# EAGLE board scheme (EAGLE 9.7.0)

Size 319.52 x 152.4 mm. Coordinates in mm from the lower left corner, seen from the top.
Outline: 0,0 319.52,0 319.52,152.4 0,152.4 0,0
Copper layers (1*16): Top 0.035mm / dielectric 1.5mm / Bottom 0.035mm
Design rules "default": minimum track width 6mil, minimum drill 0.35mm, track to track 6mil, track to pad 6mil, pad to pad 6mil, via to via 6mil, smd to smd 6mil, copper to edge 40mil, drill to drill 6mil, minimum pad ring 10mil, minimum via ring 8mil, stop-mask expansion 4mil, vias tented up to drill 0mil, thermal gap 10mil

## Footprints (pad centres in the part's own frame; a part is rotated, then mirrored left to right if it is on the bottom)
BATTERY-GENERIC = drill 1.118 pad 3.15 octagon: + 2.54,0; - -2.54,0
LEDRD254W60D565H860B_G = drill 0.981 pad 1.581: 1 -1.27,0; 2 1.27,0
LEDRD254W60D565H860B_B = drill 0.981 pad 1.581: 1 -1.27,0; 2 1.27,0
1X08 = drill 1.016 long: 1 -8.89,0; 2 -6.35,0; 3 -3.81,0; 4 -1.27,0; 5 1.27,0; 6 3.81,0; 7 6.35,0; 8 8.89,0
PIEZO = drill 1 pad 1.6: 1 -3.5,0; 2 3.5,0
RESAD1016W63L850D250B = drill 0.83 pad 1.43: 1 -5.08,0; 2 5.08,0
SWITCH-MOMENTARY-PTH-6.5MM = drill 1.016 pad 1.88: 1 -3.251,2.261; 2 3.251,2.261; 3 -3.251,-2.261; 4 3.251,-2.261
ARDUINO-UNO-R3-SHIELD = drill 1.016 pad 1.88: 3.3V 24.13,-2.54; 5V 24.13,0; A0 24.13,12.7; A1 24.13,15.24; A2 24.13,17.78; A3 24.13,20.32; A4 24.13,22.86; A5 24.13,25.4; AREF -24.13,-13.97; D2 -24.13,20.32; D3 -24.13,17.78; D4 -24.13,15.24; D5 -24.13,12.7; D6 -24.13,10.16; D7 -24.13,7.62; D8 -24.13,3.81; D9 -24.13,1.27; D10 -24.13,-1.27; D11 -24.13,-3.81; D12 -24.13,-6.35; D13 -24.13,-8.89; GND@0 24.13,2.54; GND@1 24.13,5.08; GND@2 -24.13,-11.43; IOREF 24.13,-7.62; NC 24.13,-10.16; RES 24.13,-5.08; RX -24.13,25.4; SCL -24.13,-19.05; SDA -24.13,-16.51; TX -24.13,22.86; VIN 24.13,7.62
LCD-I2C = drill 1.016 long: 1 -19.05,-5.08; 2 -19.05,-7.62; 3 -19.05,-10.16; 4 -19.05,-12.7

## Placement (x,y rotation side)
BAT1  9V  [BATTERY-GENERIC]  8.26,13.04 90 top
D7  GREEN  [LEDRD254W60D565H860B_G]  13.27,134.54 270 top
D9  BLUE  [LEDRD254W60D565H860B_B]  36.13,134.54 270 top
D17  BLUE  [LEDRD254W60D565H860B_B]  46.29,134.54 270 top
KEYPAD1  KEYPAD-4X4  [1X08]  232.08,128.41 0 top
PIEZO1  PIEZO  [PIEZO]  121.22,133.27 0 top
R2  1k  [RESAD1016W63L850D250B]  46.29,143.43 90 top
R3  1k  [RESAD1016W63L850D250B]  36.13,143.43 90 top
R4  1k  [RESAD1016W63L850D250B]  127.57,125.65 90 top
R7  1k  [RESAD1016W63L850D250B]  18.35,130.73 90 top
R8  1k  [RESAD1016W63L850D250B]  13.27,143.43 90 top
S3  SWITCH_MOMENTARY  [SWITCH-MOMENTARY-PTH-6.5MM]  20.89,142.16 90 top
U1  ARDUINO-UNO-R3-SHIELD  [ARDUINO-UNO-R3-SHIELD]  143.79,29.84 270 top
U2  LCD-16X2-I2CSUNFOUNDER-IIC  [LCD-I2C]  263.89,93.14 0 top

## Library data of the parts
BAT1 KEYPAD1 PIEZO1 R2-R4 R7 R8 S3 U1 U2 = Tinkercad
D7 = Tinkercad; CATEGORY: Opto-Electronic; SUB-CATEGORY: LED; VALUE: LED_GREEN
D9 D17 = Tinkercad; CATEGORY: Opto-Electronic; SUB-CATEGORY: LED; VALUE: LED_BLUE

## Nets
BAT1+: BAT1.+ BAT1.-
U1_5V: S3.3 S3.4 U1.5V U2.2
U1_A3: PIEZO1.1 U1.A3
U1_A4: U1.A4 U2.3
U1_A5: U1.A5 U2.4
U1_D2: R3.2 U1.D2
U1_D3: R7.2 S3.1 S3.2 U1.D3
U1_D4: KEYPAD1.8 U1.D4
U1_D5: KEYPAD1.7 U1.D5
U1_D6: KEYPAD1.6 U1.D6
U1_D7: KEYPAD1.5 U1.D7
U1_D8: KEYPAD1.4 U1.D8
U1_D9: KEYPAD1.3 U1.D9
U1_D10: KEYPAD1.2 U1.D10
U1_D11: KEYPAD1.1 U1.D11
U1_D12: R8.2 U1.D12
U1_D13: R2.2 U1.D13
U1_GND: D7.1 D7.2 D9.1 D9.2 D17.1 D17.2 R2.1 R3.1 R4.1 R7.1 R8.1 U1.GND@0 U1.GND@1 U1.GND@2 U2.1

## Tracks (layer width: path | path; a pad name or v marks a point on that pad's centre or on a via)
BAT1+  (1 unrouted)
U1_5V  (3 unrouted)
U1_A3  (1 unrouted)
U1_A4  (1 unrouted)
U1_A5  (1 unrouted)
U1_D2  (1 unrouted)
U1_D3  (3 unrouted)
U1_D4  (1 unrouted)
U1_D5  (1 unrouted)
U1_D6  (1 unrouted)
U1_D7  (1 unrouted)
U1_D8  (1 unrouted)
U1_D9  (1 unrouted)
U1_D10  (1 unrouted)
U1_D11  (1 unrouted)
U1_D12  (1 unrouted)
U1_D13  (1 unrouted)
U1_GND  (14 unrouted)